# Altium PCB DEBIX_Model_A_Camera_FPC_24Pin-15Pin_ProductionsDara.PcbDoc
Units mm, origin at the board's own origin, x right, y up, seen from the top; angles counter-clockwise.
Board outline 16 x 150 mm, 2 copper layers (Top Layer, Bottom Layer); 2 components, 12 nets, 41 pads, 47 vias.
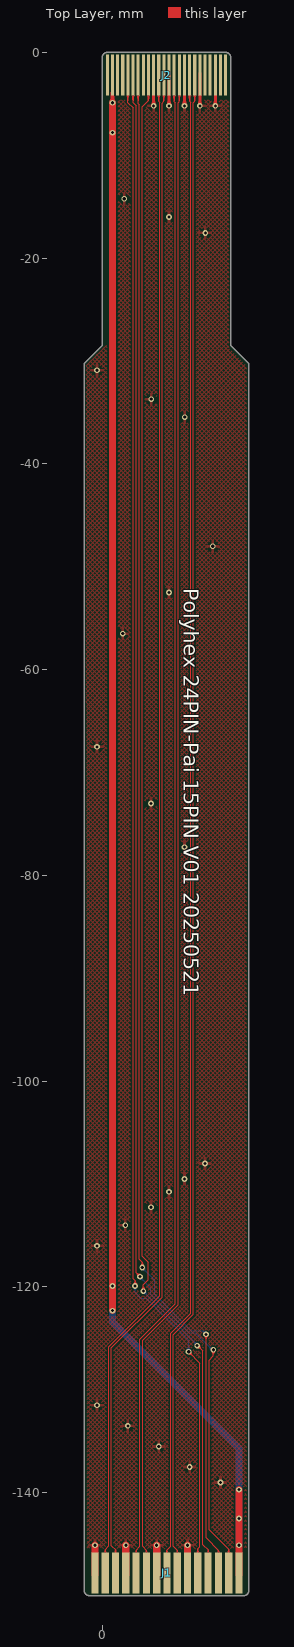
[diagram p0: Top Layer view]
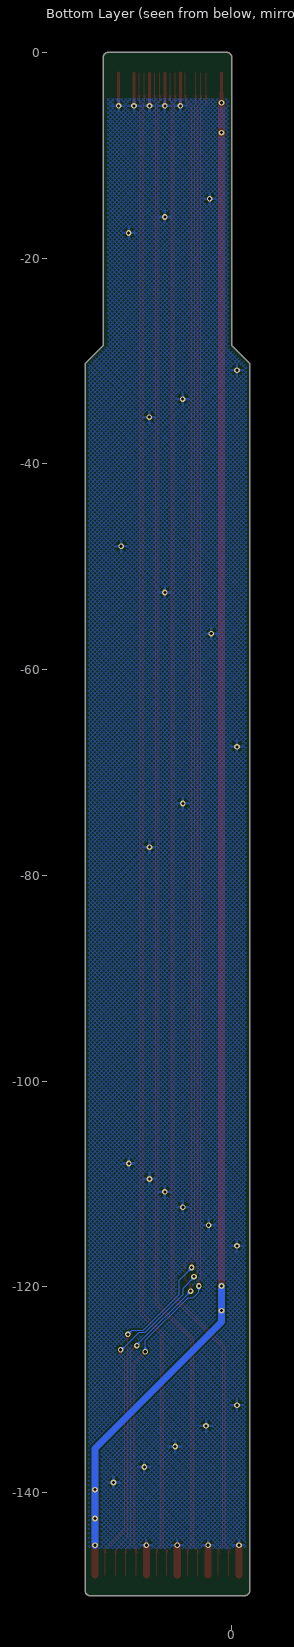
[diagram p1: Bottom Layer view, seen from below]

## Layer stack, top to bottom
Top Solder: solder mask 0.0102, Solder Resist, Dk 3.5
Top Layer: signal copper 0.0356
Dielectric 1: dielectric 0.32, FR-4, Dk 4.8
Bottom Layer: signal copper 0.0356
Bottom Solder: solder mask 0.0102, Solder Resist, Dk 3.5

## Board outline
-1.75,-149.5 -1.75,-50 -1.75,-30.25 0,-28.5 0,-0.5 cw(c0.5,-0.5) 0.5,0 12,0 cw(c12,-0.5) 12.5,-0.5 12.5,-28.5 14.25,-30.25 14.25,-50 14.25,-149.5 cw(c13.775,-149.525) 13.8,-150 -1.25,-150 cw(c-1.25,-149.5)

## Design rules (kind name [scope] priority, off if disabled: settings)
Clearance [All] p1: gap=0.15 ignorepadtopadclearanceinfootprint=FALSE except(0: Arc-Hole Track-Hole SMDPad-Hole THPad-Hole Via-Hole Fill-Hole Poly-Hole Region-Hole Text-Hole; 0.1: Arc-Arc Arc-Track Arc-SMDPad Arc-THPad Track-Track Track-SMDPad Track-THPad SMDPad-SMDPad SMDPad-THPad THPad-THPad; 0.254: Arc-Via Arc-Text Track-Via Track-Text SMDPad-Via SMDPad-Text THPad-Via THPad-Text Via-Via Via-Text Fill-Text Poly-Text Region-Text Text-Text)
DiffPairsRouting DiffPair_100oumDiffPairsRouting [All] p1: maxlimit=0.254 minlimit=0.1 mostfreqgap=0.2 toplayer_minwidth=0.1 toplayer_maxwidth=0.381 toplayer_prefwidth=0.1 bottomlayer_minwidth=0.1 bottomlayer_maxwidth=0.381 bottomlayer_prefwidth=0.1 maxuncoupledlength=12.7
MatchedLengths DiffPair_100oumMatchedLengths [All] p1: tolerance=150 checknetsindiffpair=FALSE checkdiffpairvsdiffpair=TRUE checkxsignals=TRUE checkothers=TRUE
MinimumSolderMaskSliver [All] p1: minsoldermaskwidth=0.096
PlaneClearance [All] p1: clearance=0.5
PolygonConnect [All] p1: connectstyle=Relief reliefconductorwidth=0.254 reliefentries=4 polygonreliefangle="90 Angle" airgapwidth=0.254
RoutingVias [All] p1: holewidth=0.15 width=0.35 viastyle="Through Hole" minholewidth=0.15 minwidth=0.35 maxholewidth=0.711 maxwidth=1.27
SilkToSilkClearance [All] p1: silktosilkclearance=0.15
SilkToSolderMaskClearance [IsPad] p1: minsilkscreentomaskgap=0.1 clearancetoexposedcopper=TRUE
SolderMaskExpansion [All] p1: expansion=0.102 istentingtop=FALSE
Width [All] p1: maxlimit=1 minlimit=0.1 preferedwidth=0.1
25 further rules are at their usual default settings.

## Classes and differential pairs
differential pair D_CSI_CK: +CSI_CKP -CSI_CKN
differential pair D_CSI_D0: +CSI_DP0 -CSI_DN0
differential pair D_CSI_D1: +CSI_DP1 -CSI_DN1

## Components (designator, comment, footprint, x,y, rotation, side; value= is the part's Value field where it differs from the comment)
J1 "CSI-PCB-15PIN-1mm" FPC_1.0_15PIN_PCB -0.7,-147.8 r180 top
J2 "CSI-PCB-24Pin-1mm" FPC_0.5_24PIN_PCB 0,-0.2 r0 top

## Footprints (in the part's own frame and the unit in brackets; to place one, negate y for a bottom-side part, rotate by r counter-clockwise, add the part's x,y. Pads: shape width x height; smd on the part's side, far side on the other; paste and mask are expansions set on the pad)
FPC_0.5_24PIN_PCB [mm]
  rect 0.3x4 smd mask+0.102: 1(0.5,-2) 2(1,-2) 2(1,-2) 3(1.5,-2) 4(2,-2) 5(2.5,-2) 6(3,-2) 7(3.5,-2) 8(4,-2) 9(4.5,-2) 10(5,-2) 11(5.5,-2) 12(6,-2) 13(6.5,-2) 14(7,-2) 15(7.5,-2) 16(8,-2) 17(8.5,-2) 18(9,-2) 19(9.5,-2) 20(10,-2) 21(10.5,-2) 22(11,-2) 23(11.5,-2) 24(12,-2)
FPC_1.0_15PIN_PCB [mm]
  rect 0.7x4 smd mask+0.102: 1(0,0) 1(0,0) 2(-1,0) 3(-2,0) 4(-3,0) 5(-4,0) 6(-5,0) 7(-6,0) 8(-7,0) 9(-8,0) 10(-9,0) 11(-10,0) 12(-11,0) 13(-12,0) 14(-13,0) 15(-14,0)

## Via types
v1: diameter 0.55, hole 0.3, Top Layer to Bottom Layer, tented both sides, 46 vias
v2: diameter 0.55, hole 0.35, Top Layer to Bottom Layer, tented both sides, 1 vias

## Nets (pads, with @x,y where several pads share a name; then routed paths per layer and width w, separated by ;. In a path a pad name is that pad's centre, name@x,y a point inside that pad or via, vN(x,y) a via of type N, cw(c..) or ccw(c..) an arc to the next point about the centre after c; other vN are vias at no path point)
CSI_CKN: J1.8 J2.17 | length 147
  Top Layer w0.1: J1.8@6.3,-148 6.3,-145.575 6.675,-145.2 6.675,-124.521 8.625,-122.571 8.625,-4.875 8.5,-4.75 J2.17@8.5,-2
CSI_CKP: J1.9 J2.18 | length 147
  Top Layer w0.1: J1.9@7.3,-148 7.3,-145.575 6.925,-145.2 6.925,-124.625 8.875,-122.675 8.875,-4.875 9,-4.75 J2.18@9,-2
CSI_DN0: J1.2 J2.11 | length 148.2
  Top Layer w0.1: J1.2@0.3,-148 0.3,-145.525 0.65,-145.175 0.65,-125.825 5.6,-120.875 5.6,-4.85 5.5,-4.75 J2.11@5.5,-2
CSI_DN1: J1.5 J2.14 | length 147.6
  Top Layer w0.1: J1.5@3.3,-148 3.3,-145.6 3.675,-145.225 3.675,-125.075 3.821,-124.929 7.125,-121.625 7.125,-4.9 7,-4.775 J2.14@7,-2
CSI_DP0: J1.3 J2.12 | length 148.3
  Top Layer w0.1: J1.3@1.3,-148 1.3,-145.55 0.9,-145.15 0.9,-125.929 5.85,-120.979 5.85,-4.922 6,-4.772 J2.12@6,-2
CSI_DP1: J1.6 J2.15 | length 147.6
  Top Layer w0.1: J1.6@4.3,-148 4.3,-145.6 3.925,-145.225 3.925,-125.179 7.375,-121.729 7.375,-4.9 7.5,-4.775 J2.15@7.5,-2
CSI_MCLK: J1.12 J2.9 | length 149.5
  Top Layer w0.1: v1(4,-120.4) 4,-119.8 4.504,-119.296 4.504,-117.604 3.9,-117 3.9,-5.3 4.5,-4.7 J2.9@4.5,-2 ; v1@9.304,-125.704 9.8,-126.2 9.8,-145.05 10.3,-145.55 J1.12@10.3,-148
  Top Layer w0.15: v1(9.233,-125.704) v1@9.304,-125.704
  Bottom Layer w0.1: v1(4,-120.4) 9.233,-125.633 v1(9.233,-125.704)
  Bottom Layer w0.15: v1@9.152,-125.552 9.152,-125.623 v1(9.233,-125.704)
CSI_nRST: J1.11 J2.5 | length 149.3
  Top Layer w0.1: J2.5@2.5,-2 2.5,-4.9 3,-5.4 3,-119.2 3.2,-119.4 v1(3.2,-119.9) ; v2(8.4,-126.3) 9.5,-127.4 9.5,-145.25 9.3,-145.45 J1.11@9.3,-148
  Bottom Layer w0.1: v1(3.2,-119.9) 3.2,-120.5 3.775,-121.075 4.275,-121.075 8.4,-125.2 v2(8.4,-126.3)
GND: J1.1 J1.4 J1.7 J1.10 J2.10 J2.13 J2.16 J2.19 J2.22 | length 27.7
  Top Layer w0.3: v1@5,-5.225 v1(5,-5.2) J2.10@5,-2 ; v1(6.5,-5.2) J2.13@6.5,-2 ; J2.16@8,-2 8,-5.175 v1@8.025,-5.2 ; v1@9.5,-5.225 J2.19@9.5,-2 ; J2.22@11,-2 v1(11,-5.2) v1@11.025,-5.225
  Top Layer w0.7: J1.1@-0.7,-148 v1(-0.7,-145.1) ; J1.4@2.3,-148 v1(2.3,-145.1) ; J1.7@5.3,-148 v1(5.3,-145.1) ; J1.10@8.3,-148 v1(8.3,-145.1)
  other v1: 11.5,-139 8.5,-137.5 5.5,-135.5 2.5,-133.5 -0.5,-131.5 -0.5,-116 2.25,-114 4.75,-112.25 6.5,-110.75 8,-109.5 10,-108 8,-77.25 4.75,-73 -0.5,-67.5 2,-56.5 6.5,-52.5 10.75,-48 8.025,-35.45 4.775,-33.7 -0.5,-30.9 10.025,-17.55 6.5,-16 2.15,-14.225 8,-5.2 9.5,-5.2
I2C_SCL: J1.13 J2.7 | length 149.9
  Top Layer w0.1: J2.7@3.5,-2 3.5,-5 3.6,-5.1 3.6,-117.3 3.9,-117.6 v1(3.9,-118.1) ; v1(10.1,-124.6) 10.1,-144.375 11.3,-145.575 J1.13@11.3,-148
  Bottom Layer w0.1: v1@3.9,-118.15 5.1,-119.35 5.1,-120.7 8.65,-124.25 9.75,-124.25 v1(10.1,-124.6)
  Bottom Layer w0.15: v1@3.9,-118.15 v1(3.9,-118.1)
I2C_SDA: J1.14 J2.6 | length 150.6
  Top Layer w0.1: J2.6@3,-2 3,-4.9 3.3,-5.2 3.3,-118.6 v1@3.7,-119 ; v1@10.8,-126.104 10.8,-126.7 10.4,-127.1 10.4,-143.6 12.3,-145.5 J1.14@12.3,-148
  Top Layer w0.15: v1@10.8,-126.104 v1(10.804,-126.1)
  Bottom Layer w0.1: v1(3.679,-119) 3.679,-119.079 4.7,-120.1 4.7,-120.7 8.45,-124.45 9.05,-124.45 v1@10.7,-126.1
  Bottom Layer w0.15: v1@10.7,-126.1 v1(10.804,-126.1)
VDD_3V3: J1.15 J2.2 | length 159
  Top Layer w0.254: v1@0.975,-4.925 v1(1,-4.9)
  Top Layer w0.3: v1(1,-4.9) J2.2@1,-2
  Top Layer w0.5: J1.15@13.3,-148 J1.15@13.313,-147.987 ; v1(13.3,-145.1) v1@13.325,-145.075 ; v1@13.313,-145.126 13.31,-145.123 13.31,-145.115 v1@13.313,-145.112
  Top Layer w0.7: v1(1,-122.3) v1(1,-119.9) v1(1,-7.8) v1(1,-4.9) ; J1.15@13.3,-148 v1(13.3,-145.1) v1(13.3,-142.5) v1(13.3,-139.7)
  Bottom Layer w0.7: v1(1,-119.9) v1(1,-122.3) 1,-123.4 13.3,-135.7 ; v1(13.3,-145.1) v1(13.3,-142.5) v1(13.3,-139.7) 13.3,-135.725
pads on no net: J2.1 J2.3 J2.4 J2.8 J2.20 J2.21 J2.23 J2.24

## Polygon pours and split planes (outlines as drawn)
GND on Top Layer "GND_L01_P000" (hatched 45Degree grid 0.3 track 0.1, remove dead copper, pour order 0): 0.5,-4.6 12.3,-4.6 12.3,-28.7 14,-30.4 14,-145.5 -1.45,-145.45 -1.55,-30.35 0.5,-28.3
GND on Bottom Layer "GND_L02_P001" (hatched 45Degree grid 0.3 track 0.1, remove dead copper, pour order 1): 0.3,-4.5 12.124,-4.5 12.076,-28.476 13.95,-30.35 13.95,-145.5 -1.35,-145.5 -1.45,-30.45 0.3,-28.7

## Silkscreen, mask and mechanical layers (free items; w line width, h text height)
Top Overlay:
  text "Polyhex 24PIN-Pai 15PIN V01 20250521" at 7.425,-52.1 h2.5 r270
Top Paste:
  lines w0.1: -1.25,-150 13.75,-150 ccw(c13.75,-149.5) 14.25,-149.5 14.25,-144 -1.8,-144 -1.8,-149.45 ccw(c-1.238,-149.438) -1.225,-150 ; 0,-6 0,-0.5 cw(c0.5,-0.5) 0.5,0 12,0 cw(c12,-0.5) 12.5,-0.5 12.5,-6 0,-6
Top Solder:
  rectangle: -1.325,-149.825 13.925,-146.4
  rectangle: 0.225,-3.8 12.25,-0.175
Mechanical 1:
  the board outline again, w0.01

## Dimensions
-1.8,-149.45 to 14.25,-149.5 on Top Paste
0,-0.5 to 12.5,-0.5 on Top Paste
12.5,-6 to 12,0 on Top Paste
14.25,-144 to 13.75,-150 on Top Paste